# Altium PCB PCB6.PcbDoc
Units mil, origin at the board's own origin, x right, y up, seen from the top; angles counter-clockwise.
Board outline 4488.16 x 4488.19 mil, 2 copper layers (Top Layer, Bottom Layer); 61 components, 47 nets, 259 pads, 43 vias.
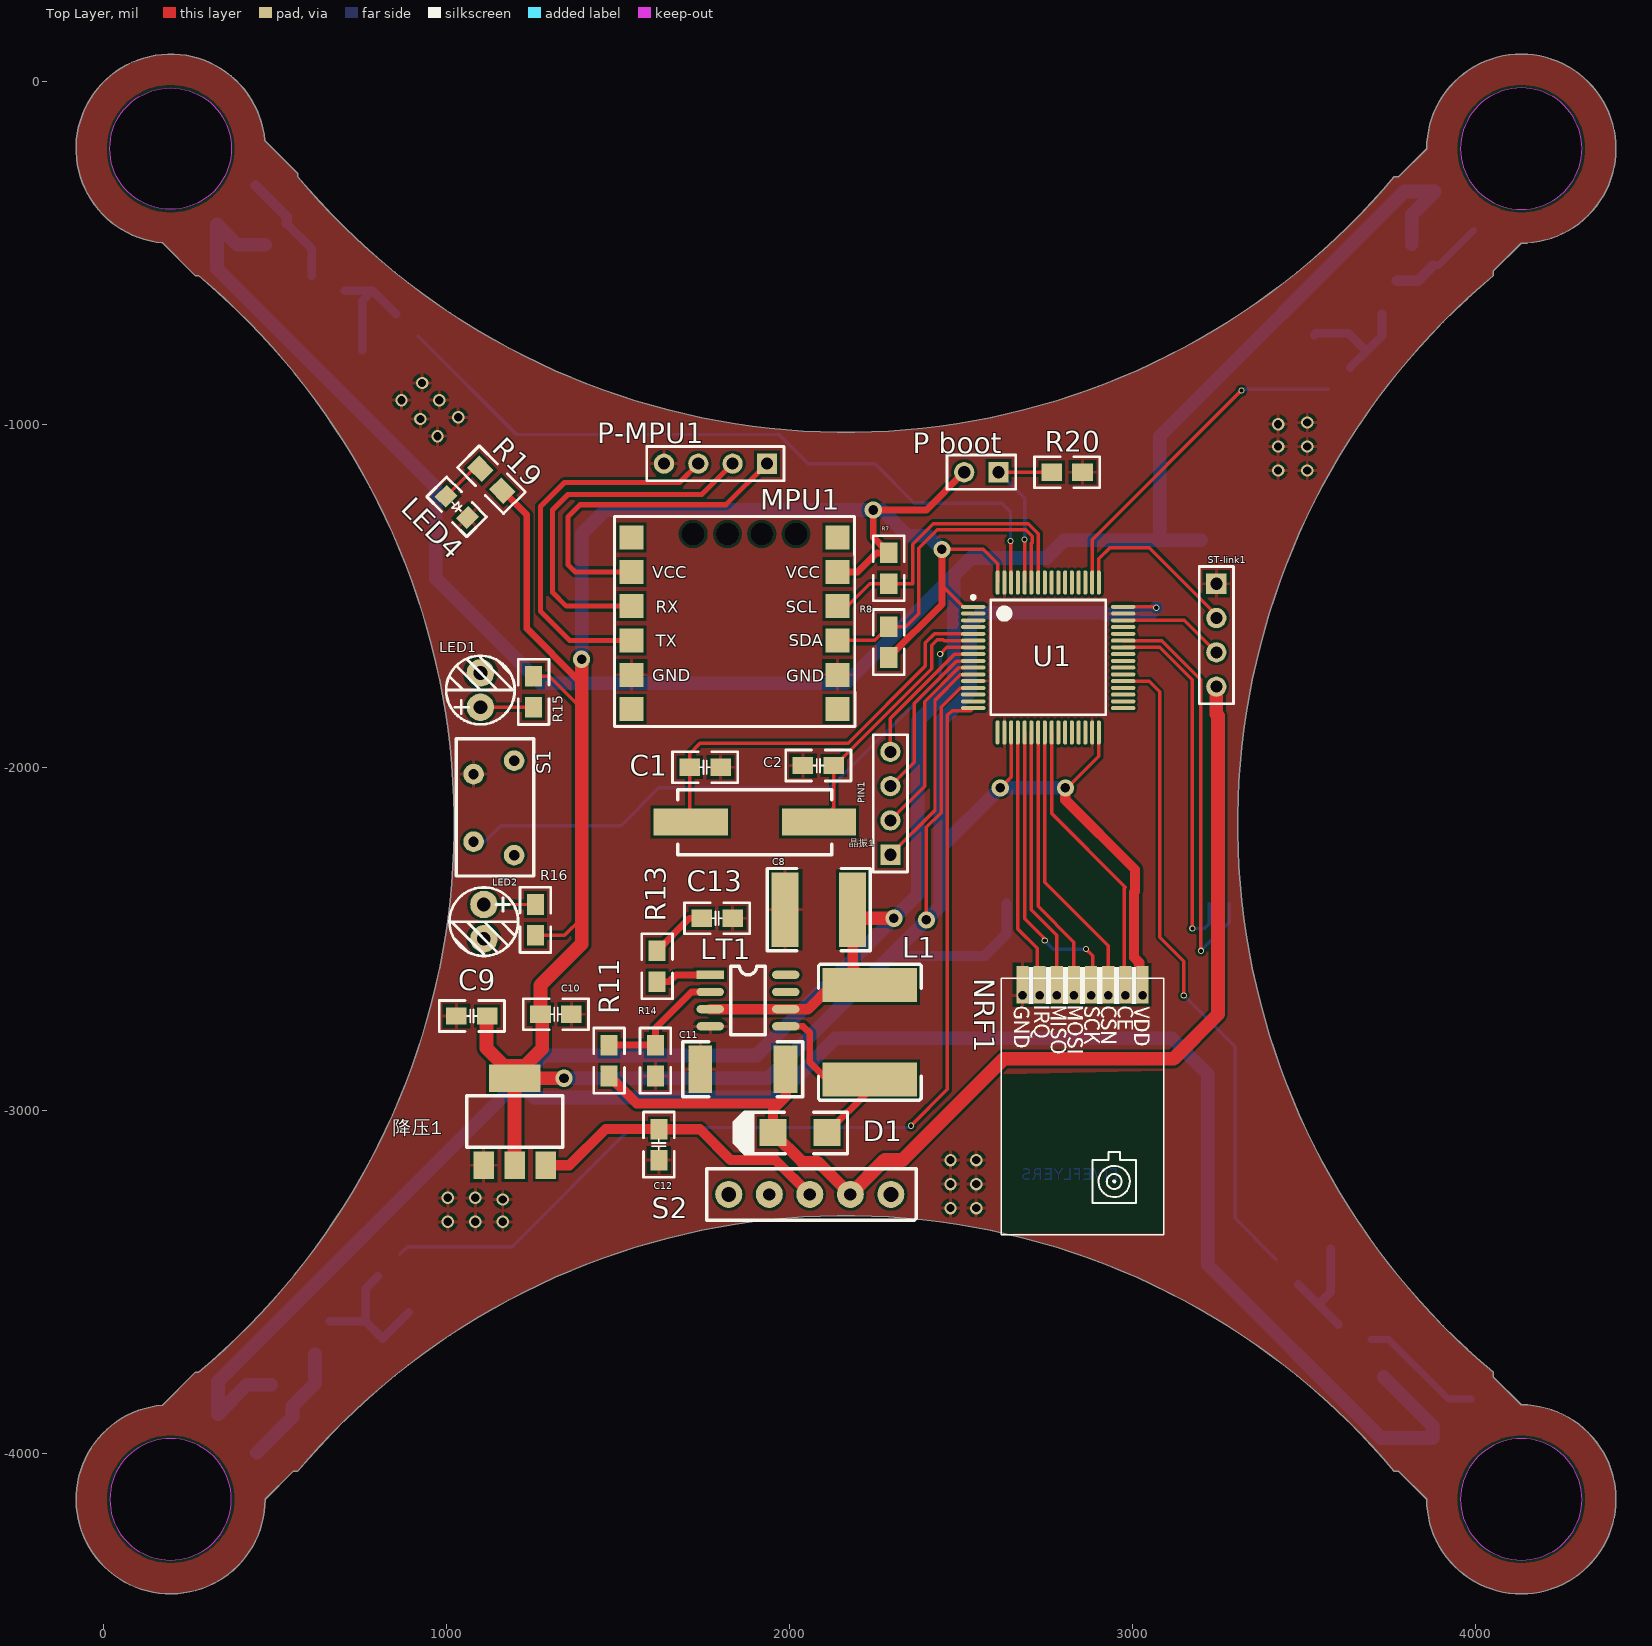
[diagram p0: Top Layer view]
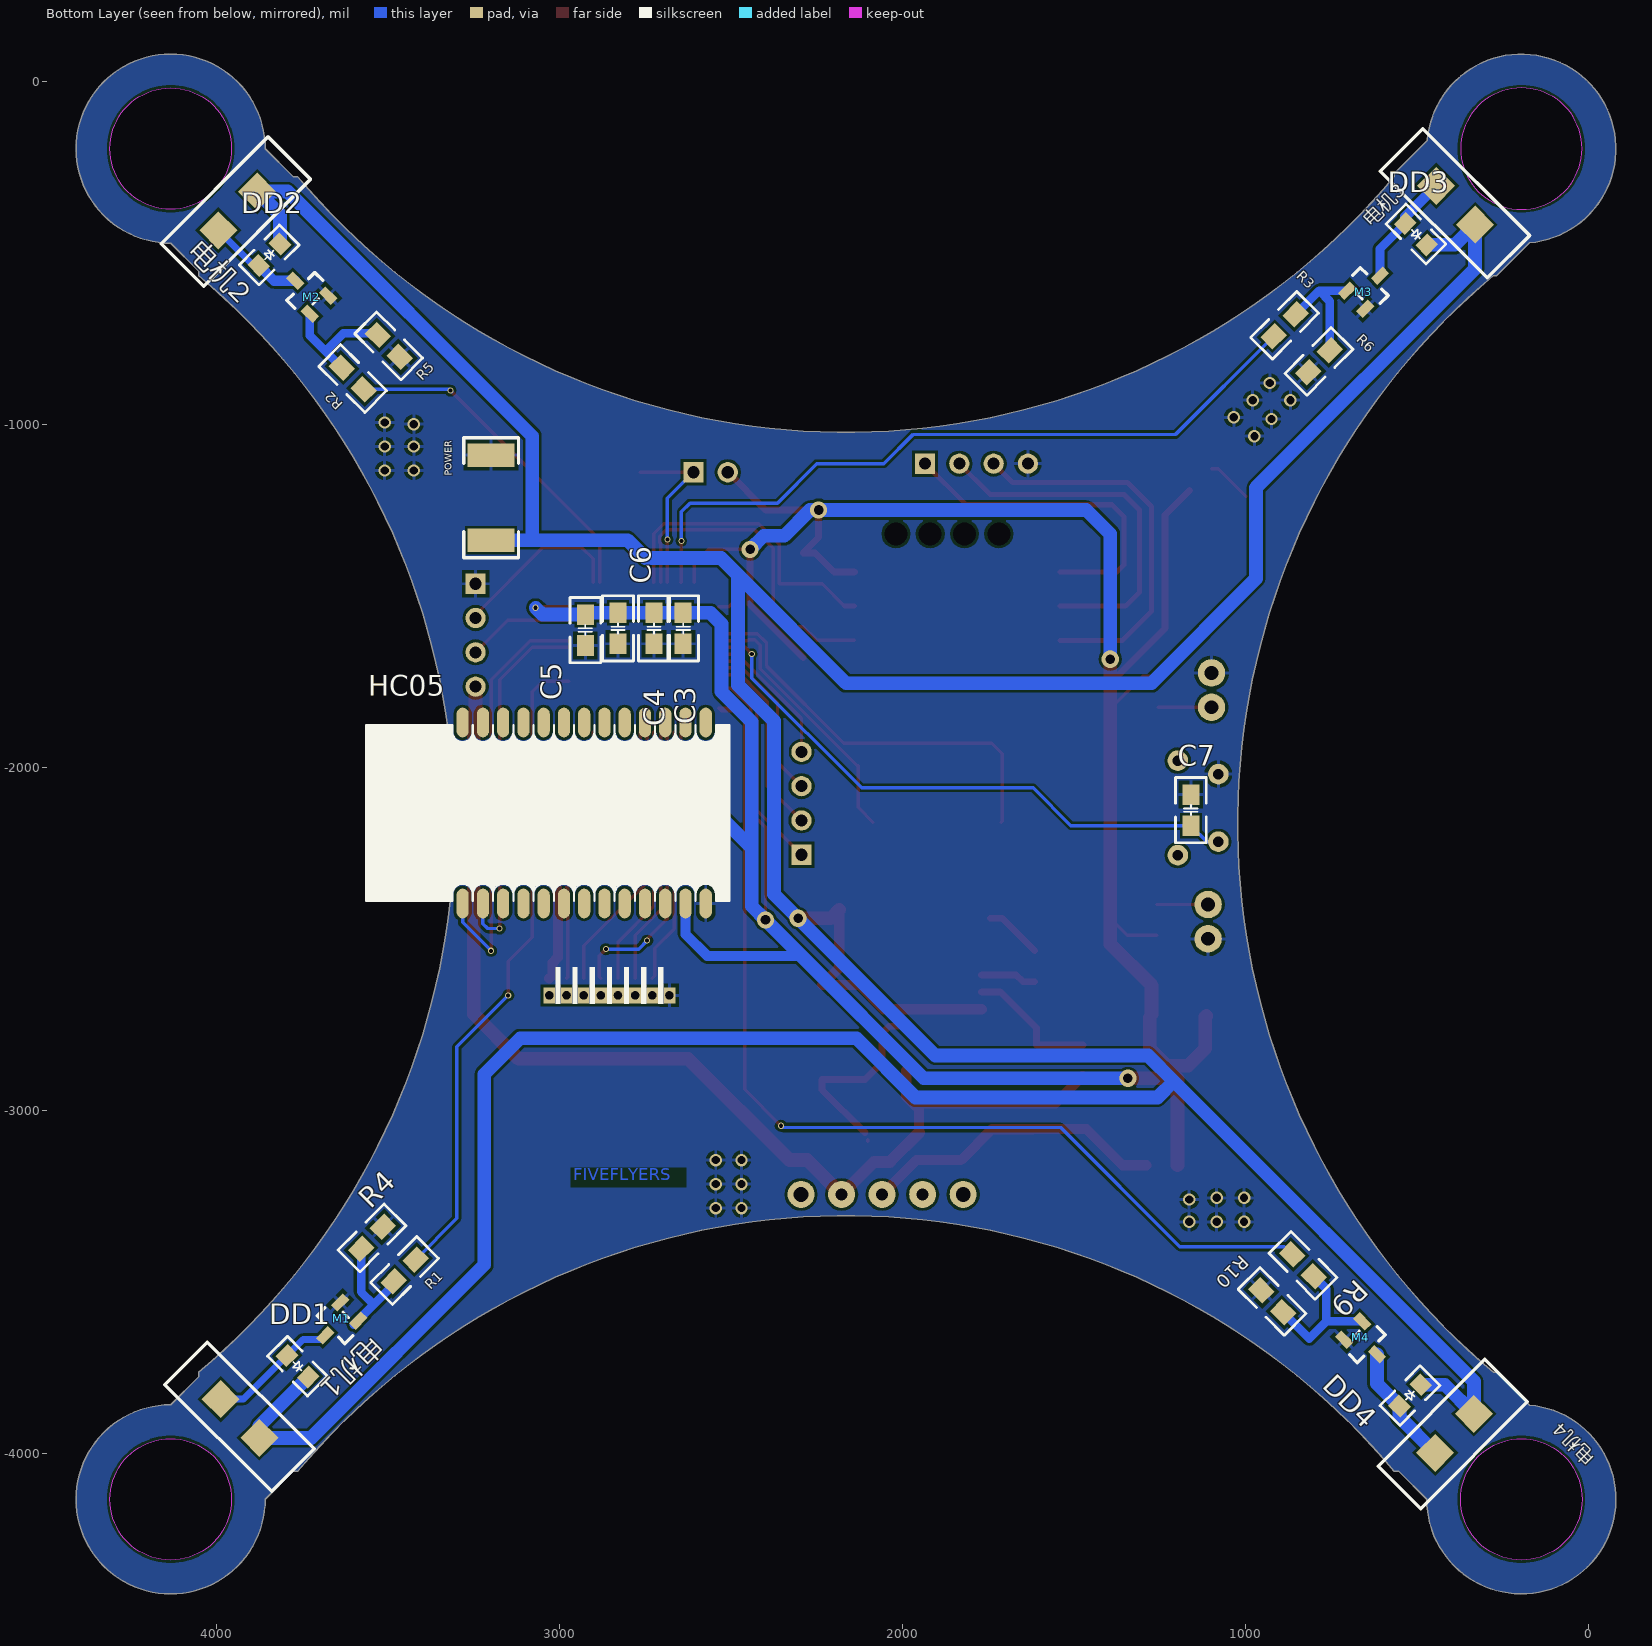
[diagram p1: Bottom Layer view, seen from below]

## Layer stack, top to bottom
Top Solder: solder mask 0.4, Solder Resist, Dk 3.5
Top Layer: signal copper 1.4
Dielectric 1: dielectric 12.6, FR-4, Dk 4.8
Bottom Layer: signal copper 1.4
Bottom Solder: solder mask 0.4, Solder Resist, Dk 3.5

## Board outline
172.83,-3859.32 ccw(c196.85,-4133.86) 472.44,-4133.86 553.85,-4052.45 566.92,-4052.45 cw(c2165.35,-5393.7) 3763.79,-4052.45 3776.86,-4052.45 3858.27,-4133.86 ccw(c4133.86,-4133.86) 4133.86,-3858.27 4052.45,-3776.86 4052.45,-3763.79 cw(c5393.7,-2165.35) 4052.45,-566.92 4052.45,-553.85 4133.86,-472.44 ccw(c4133.86,-196.85) 3858.27,-196.85 3776.86,-278.26 3763.79,-278.26 cw(c2165.35,1062.99) 566.92,-278.26 566.92,-268.35 471.39,-172.83 ccw(c196.85,-196.85) 172.83,-471.39 268.35,-566.92 278.26,-566.92 cw(c-1062.99,-2165.35) 278.26,-3763.79 268.35,-3763.79
cut-out: 196.85,-374.02 cw(c196.85,-196.85) 19.68,-196.85 cw(c196.85,-196.85) 196.85,-19.69 cw(c196.85,-196.85) 374.02,-196.85 cw(c196.85,-196.85)
cut-out: 3956.69,-196.85 ccw(c4133.86,-196.85) 4133.86,-374.02 ccw(c4133.86,-196.85) 4311.02,-196.85 ccw(c4133.86,-196.85) 4133.86,-19.69 ccw(c4133.86,-196.85)
cut-out: 19.68,-4133.86 ccw(c196.85,-4133.86) 196.85,-4311.02 ccw(c196.85,-4133.86) 374.02,-4133.86 ccw(c196.85,-4133.86) 196.85,-3956.69 ccw(c196.85,-4133.86)
cut-out: 3956.69,-4133.86 ccw(c4133.86,-4133.86) 4133.86,-4311.02 ccw(c4133.86,-4133.86) 4311.02,-4133.86 ccw(c4133.86,-4133.86) 4133.86,-3956.69 ccw(c4133.86,-4133.86)

## Design rules (kind name [scope] priority, off if disabled: settings)
Clearance [All] p1: gap=8
ComponentClearance [All] p1: gap=-999 collisioncheckmode=3 verticalgap=-999 showdistances=FALSE
PolygonConnect [All] p1: connectstyle=Relief reliefconductorwidth=10 reliefentries=4 polygonreliefangle="90 Angle" airgapwidth=10
RoutingVias [All] p1: holewidth=28 width=50 viastyle="Through Hole" minholewidth=12 minwidth=18 maxholewidth=28 maxwidth=50
SolderMaskExpansion [All] p1: expansion=4
Width [All] p1: maxlimit=999 minlimit=8 preferedwidth=10
29 further rules are at their usual default settings.

## Components (designator, comment, footprint, x,y, rotation, side; value= is the part's Value field where it differs from the comment)
C1 "22pF" 0805C 4310,-5475 r180 top
C2 "22PF" 0805C -470,1480 r0 top
C3 "100nF" 0805C 6115,-4150 r90 bottom
C4 "100nF" 0805C 6200,-4150 r90 bottom
C5 "100nF" 0805C 6400,-4155 r90 bottom
C6 "100nF" 0805C 6305,-4150 r90 bottom
C7 "100nF" 0805C -2315,430 r270 bottom
C8 "" 5*5.5 2086.57,-2415 r180 top
C9 "Cap" 0805C -1480,750 r0 top
C10 "Cap" 0805C 3875,-6195 r180 top
C11 "220uF" 6.3*7 1865,-2880 r180 top
C12 "10uF" 0805C 5095,-545 r270 top
C13 "100pF" 0805C 4345,-5915 r180 top
D1 "" SMA 2110,-3065 r180 top
DD1 "led" 0805d 4671.81,-18847.09 r225 bottom
DD2 "led" 0805d -11254.86,-1414.04 r135 bottom
DD3 "led" 0805d 1411.81,-15547.09 r225 bottom
DD4 "led" 0805d -14579.86,-4739.04 r135 bottom
HC05 "" HC05 2960,-2265 r0 bottom
L1 "" 7*7*4 2235,-2772.2 r270 top
LED1 "LED" RB.1/.2 1100,-1825 r270 top
LED2 "LED" RB.1/.2 1110,-2400 r90 top
LED4 "" 0805d 123.19,-16342.09 r315 top
LT1 "LT1308" SO-8 1770,-2605 r0 top
M1 "MOS" mos 2576.53,-629.99 r135 bottom
M2 "MOS" mos 744.99,-1688.47 r225 bottom
M3 "MOS" mos 1715.36,-3593.58 r315 bottom
M4 "MOS" mos 3643.58,-2604.64 r45 bottom
MPU1 "MPU" MPU 5720.67,-11168.11 r0 top
NRF1 "NRF" nrf 3448.58,-2569.57 r270 top
"P boot" "Header 2" HDR1X2 3130,-1600 r180 top
P-MPU1 "Header 4" HDR1X4#1 1935,-1115 r180 top
PIN1 "Header 4" HDR1X4#1 2295,-2255 r90 top
POWER "3.7V" 6.3*7 3200,-1214.02 r90 bottom
R1 "1k" 0805R -9237.21,8486.82 r315 bottom
R2 "1k" 0805R -8350.46,-13555.85 r45 bottom
R3 "1k" 0805R 13575.85,-12665.46 r135 bottom
R4 "10k" 0805R -9142.21,8581.82 r315 bottom
R5 "10k" 0805R -8455.46,-13460.85 r45 bottom
R6 "10k" 0805R 13475.85,-12770.46 r135 bottom
R7 "4.7k" 0805R 1770,-18845 r90 top
R8 "4.7k" 0805R 1770,-19060 r90 top
R9 "1k" 0805R 12786.82,9237.21 r225 bottom
R10 "10k" 0805R 12876.82,9132.21 r225 bottom
R11 "" 0805R 1995,14570 r270 top
R13 "" 0805R 2135,14845 r270 top
R14 "" 0805R 1090,-20280 r90 top
R15 "1K" 0805r 1775,15645 r270 top
R16 "1K" 0805R 740,-19870 r90 top
R19 "1K" 0805r 13085.46,-13850.85 r135 top
R20 "10k" 0805R 20235,-1660 r180 top
S1 "SW-PB" key 1075,-2576.85 r90 top
S2 "SW-PB" 总开关 -4190,-7915 r180 top
ST-link1 "Header 4" HDR1X4#2 3305,-1580 r270 top
U1 "STM32F101R8T6" LQFP64_N 2755,-1680 r0 top net-tie
晶振1 "晶振" LC-HC-49SMD 1900,-2160 r0 top
电机1 "MOTOR" "motor hanpan" 3860.86,-3841.86 r315 bottom
电机2 "MOTOR" "motor hanpan" 3995,-307.72 r225 bottom
电机3 "MOTOR" "motor hanpan" 317.72,-305 r315 bottom
电机4 "MOTOR" "motor hanpan" 448.14,-3870.86 r225 bottom
降压1 "LM1117-3.3V" SOT223 1109.45,-3160 r0 top

## Footprints (in the part's own frame and the unit in brackets; to place one, negate y for a bottom-side part, rotate by r counter-clockwise, add the part's x,y. Pads: shape width x height; smd on the part's side, far side on the other; paste and mask are expansions set on the pad)
5*5.5 [mm]
  rect 2x5.5 smd: 1(-2.5,0) 2(2.5,0)
  silkscreen extent -3.81,-3.05 3.81,3.05
6.3*7 [mm]
  rect 1.75x3.5 smd: 1(-3.15,0) 2(3.15,0)
  silkscreen extent -4.44,-2.03 4.44,2.03
7*7*4 [mm]
  rect 2.5x7 smd: 1(-3.5,0) 2(3.5,0)
  silkscreen extent -5.03,-3.8 5.03,3.8
0805C [mil]
  rect 60x50 smd: 1(2510,-3475) 2(2600,-3475)
  silkscreen extent 2460,-3520 2650,-3430
0805d [mil]
  rect 45x50 smd: 1(-10080,11320) 2(-9992,11320)
  silkscreen extent -10119,11279 -9954,11361
0805R [mil]
  rect 60x50 smd: 1(17380,-520) 2(17470,-520)
  silkscreen extent 17330,-565 17520,-475
0805r [mil]
  rect 60x50 smd: 1(17380,-520) 2(17470,-520)
  silkscreen extent 17330,-565 17520,-475
HC05 [mm]
  oval 0.9x2.2 smd: 1(8.199,3.353) 2(6.699,3.353) 3(5.199,3.353) 4(3.699,3.353) 5(2.199,3.353) 6(0.699,3.353) 7(-0.801,3.353) 8(-2.301,3.353) 9(-3.801,3.353) 10(-5.301,3.353) 11(-6.801,3.353) 12(-8.301,3.353) 13(-9.801,3.353) 22(-9.801,-10.047) 23(-8.301,-10.047) 24(-6.801,-10.047) 25(-5.301,-10.047) 26(-3.801,-10.047) 27(-2.301,-10.047) 28(-0.801,-10.047) 29(0.699,-10.047) 30(2.199,-10.047) 31(3.699,-10.047) 32(5.199,-10.047) 33(6.699,-10.047) 34(8.199,-10.047)
  silkscreen extent -11.55,-9.85 15.35,3.15
HDR1X2 [mm]
  rect 1.5x1.5 hole 0.9: 1(13.208,-11.684)
  round 1.5 hole 0.9: 2(15.748,-11.684)
  silkscreen extent 11.94,-12.95 17.02,-10.41
HDR1X4#1 [mm] "Connector; Header; 4 Position"
  rect 1.5x1.5 hole 0.9: 1(0,0)
  round 1.5 hole 0.9: 2(2.54,0) 3(5.08,0) 4(7.62,0)
  silkscreen extent -1.27,-1.27 8.89,1.27
HDR1X4#2 [mm]
  rect 1.5x1.5 hole 0.9: 1(-2.921,-1.524)
  round 1.5 hole 0.9: 2(-0.381,-1.524) 3(2.159,-1.524) 4(4.699,-1.524)
  silkscreen extent -4.19,-2.79 5.97,-0.25
key [mil]
  round 60 hole 30: 1(360,-5) 2(556.85,-5) 3(320.63,-123.11) 4(596.22,-123.11)
  silkscreen extent 260,-180 660,45
LC-HC-49SMD [mm]
  rect 5.5x2 smd: 1(-4.75,0) 2(4.75,0)
  silkscreen extent -5.7,-2.4 5.7,2.4, body extent -6.7,-2.46 6.7,2.44, height 4
LQFP64_N [mm] "Thin QFP, 64-Leads, Body 10x10mm, Pitch 0.5mm, IPC Medium Density"
  oval 1.8x0.3 smd: 1(-5.55,3.75) 2(-5.55,3.25) 3(-5.55,2.75) 4(-5.55,2.25) 5(-5.55,1.75) 6(-5.55,1.25) 7(-5.55,0.75) 8(-5.55,0.25) 9(-5.55,-0.25) 10(-5.55,-0.75) 11(-5.55,-1.25) 12(-5.55,-1.75) 13(-5.55,-2.25) 14(-5.55,-2.75) 15(-5.55,-3.25) 16(-5.55,-3.75) 33(5.55,-3.75) 34(5.55,-3.25) 35(5.55,-2.75) 36(5.55,-2.25) 37(5.55,-1.75) 38(5.55,-1.25) 39(5.55,-0.75) 40(5.55,-0.25) 41(5.55,0.25) 42(5.55,0.75) 43(5.55,1.25) 44(5.55,1.75) 45(5.55,2.25) 46(5.55,2.75) 47(5.55,3.25) 48(5.55,3.75)
  oval 0.3x1.8 smd: 17(-3.75,-5.55) 18(-3.25,-5.55) 19(-2.75,-5.55) 20(-2.25,-5.55) 21(-1.75,-5.55) 22(-1.25,-5.55) 23(-0.75,-5.55) 24(-0.25,-5.55) 25(0.25,-5.55) 26(0.75,-5.55) 27(1.25,-5.55) 28(1.75,-5.55) 29(2.25,-5.55) 30(2.75,-5.55) 31(3.25,-5.55) 32(3.75,-5.55) 49(3.75,5.55) 50(3.25,5.55) 51(2.75,5.55) 52(2.25,5.55) 53(1.75,5.55) 54(1.25,5.55) 55(0.75,5.55) 56(0.25,5.55) 57(-0.25,5.55) 58(-0.75,5.55) 59(-1.25,5.55) 60(-1.75,5.55) 61(-2.25,5.55) 62(-2.75,5.55) 63(-3.25,5.55) 64(-3.75,5.55)
  silkscreen extent -5.67,-4.25 4.25,4.57, body extent -5,-5 5,5, height 1.6
mos [mm]
  rect 1.25x0.7 smd: 1(-71.725,-35.424) 2(-71.725,-33.524) 3(-74.225,-34.474)
  silkscreen extent -73.63,-35.93 -72.07,-33.01, body extent -74.47,-35.97 -71.47,-32.97, height 1.3
"motor hanpan" [mil]
  rect 78.74x78.74 smd: 1(90,70) 2(90,-90)
  silkscreen extent 0,-235 175,205
MPU [mil]
  oval 39.37x47.24 hole 66.93: 0(-4000.67,9848.11) 0(-3900.67,9848.11) 0(-3800.67,9848.11)
  rect 39.37x47.24 hole 66.93: 0(-3700.67,9848.11)
  rect 70x70 smd: 1(-4180.04,9837.74) 2(-4180.04,9737.74) 3(-4180.04,9637.74) 4(-4180.04,9537.74) 5(-4180.04,9437.74) 6(-4180.04,9337.74) 7(-3580.04,9337.74) 8(-3580.04,9437.74) 9(-3580.04,9537.74) 10(-3580.04,9637.74) 11(-3580.04,9737.74) 12(-3580.04,9837.74)
  silkscreen extent -4230,9287 -3529,9899
nrf [mil]
  rect 70.87x35.43 smd: 1(45.44,-418.58) 2(45.44,-468.58) 3(45.44,-518.58) 4(45.44,-568.58) 5(45.44,-618.58) 6(45.44,-668.58) 7(45.44,-718.58) 8(45.44,-768.58)
  rect 47.24x35.43 hole 23.62 slot 23.82 at 0 deg: 1(95.44,-418.58) 2(95.44,-468.58) 3(95.44,-518.58) 4(95.44,-568.58) 5(95.44,-618.58) 6(95.44,-668.58) 7(95.44,-718.58) 8(95.44,-768.58)
  silkscreen extent 14,-830 793,-358
RB.1/.2 [mil]
  round 80 hole 40: 1(0,0) 2(-100,0)
  silkscreen extent -150,-100 50,100
SMA [mm]
  rect 2x2 smd: A(0,0) K(4,0)
  silkscreen extent -1.52,-1.52 6.86,1.55
SO-8 [mil]
  rect 80x24 smd: 1(0,0)
  oval 80x24 smd: 2(0,-50) 3(0,-100) 4(0,-150) 5(220,-150) 6(220,-100) 7(220,-50) 8(220,0)
  silkscreen extent 60,-175 160,25
SOT223 [mil]
  rect 59x79 smd: 1(0,0) 2(90.55,0) 3(181.1,0)
  rect 150x79 smd: 4(89.88,253.54)
  silkscreen extent -49,52 231,202
总开关 [mm]
  round 2 hole 0.9: 1(-161.75,-118.618) 2(-158.75,-118.618) 3(-155.75,-118.618)
  round 2 hole 1.1: 4(-152.75,-118.618) 5(-164.75,-118.618)
  silkscreen extent -166.62,-120.52 -151.13,-116.71

## Part data
C1 C2 C3 C4 C5 C6 C7 C13: library part 陶瓷电容
C8 C11 POWER: library part CAP-T, "钽电容"
C9 C10: "Capacitor"
C12: library part C_0.1uF, "SMD-CAP"
D1: library part "Diode 11DQ03", "Schottky Rectifier"
HC05: library part HC05
L1: library part Inductor, "Inductor"
LED1 LED2: "LED发光管"
LED4 R1 R2 R3 R4 R5 R6 R7 R8 R9 R10 R15 R16 R19: library part R, "电阻"
MPU1: library part mpu9250
NRF1: library part Component_2.nrf, "nrf"
"P boot": "Header, 2-Pin"
P-MPU1 PIN1 ST-link1: "Header, 4-Pin"
R11 R13 R14: library part Res3, "Resistor"
R20: library part R
S1 S2: "Switch"
U1: "STM32 ARM-based 32-bit MCU with 64 Kbytes Flash, 64-pin LQFP, Industrial Temperature"
降压1: library part Component_1

## Via types
v1: diameter 36, hole 24, Top Layer to Bottom Layer, 24 vias
v2: diameter 18, hole 12, Top Layer to Bottom Layer, 11 vias
v3: diameter 50, hole 28, Top Layer to Bottom Layer, 8 vias

## Nets (pads, with @x,y where several pads share a name; then routed paths per layer and width w, separated by ;. In a path a pad name is that pad's centre, name@x,y a point inside that pad or via, vN(x,y) a via of type N, cw(c..) or ccw(c..) an arc to the next point about the centre after c; other vN are vias at no path point)
BOOT: "P boot.1" R20.2 U1.60 | length 508
  Top Layer w10: 2610,-1140 R20.2 ; U1.60 v2(2686.1,-1336.1)
  Bottom Layer w10: 2610,-1140 2686.1,-1216.1 v2(2686.1,-1336.1)
CE: NRF1.2 U1.25 | length 808.1
  Top Layer w10: U1.25 2764.84,-2134.84 2980,-2350 2977,-2353 2977,-2612 NRF1.2@2980,-2615
CSN: NRF1.3 U1.24 | length 793.1
  Top Layer w10: U1.24 2745.16,-2335.16 2930,-2520 NRF1.3@2930,-2615
GND: C1.1 C2.1 C3.1 C4.1 C5.1 C6.1 C7.1 C8.2 C9.1 C10.1 C11.2 C12.2 C13.1 HC05.13 LED1.2 LED2.2 LED4.2 LT1.4 M1.2 M2.2 M3.2 M4.2 MPU1.5 MPU1.8 NRF1.8 P-MPU1.4 POWER.2 R4.1 R5.1 R6.1 R10.1 R14.1 R20.1 S1.2 ST-link1.1 U1.12 U1.18 U1.31 U1.47 U1.63 降压1.1
  other v1: 1005,-3325 1085,-3325 1165,-3325 2470,-3285 2545,-3285 1165,-3260 1005,-3255 1085,-3255 2470,-3215 2545,-3215 2470,-3145 2545,-3145 3425,-1135 3510,-1135 3425,-1065 3510,-1065 975,-1035 3425,-1000 3510,-995 925,-985 1035,-980 870,-930 980,-930 930,-880
IRQ: NRF1.7 U1.20 | length 742.8
  Top Layer w10: U1.20 2666.42,-2471.42 2723,-2528 2723,-2608 NRF1.7@2730,-2615
MISO: NRF1.6 U1.22 | length 747.2
  Top Layer w10: U1.22 2705.79,-2415.79 2780,-2490 NRF1.6@2780,-2615
MOSI: NRF1.5 U1.23 | length 759.8
  Top Layer w10: U1.23 2725.47,-2405.47 2830,-2510 NRF1.5@2830,-2615
NetC1_2: C1.2 U1.5 晶振1.1 | length 1212.6
  Top Layer w10: 晶振1.1 1710,-2157.01 C1.2 1710,-1960 1740,-1930 2171.85,-1930 2397,-1704.85 2397,-1636.9 2423.43,-1610.47 2460.47,-1610.47 2461.1,-1611.1 U1.5
NetC2_2: C2.2 U1.6 晶振1.2 | length 781.9
  Top Layer w10: 晶振1.2 2130,-2117.01 C2.2 2132.31,-1995 2415,-1712.31 2415,-1644.36 2430.89,-1628.47 2449.11,-1628.47 2451.43,-1630.79 U1.6
NetC7_2: C7.2 S1.1 U1.7 | length 1732.1
  Top Layer w10: v2(2440,-1670) 2459.53,-1650.47 U1.7
  Bottom Layer w10: S1.1 1113.15,-2216.85 C7.2 1510,-2170 1620,-2060 2120,-2060 2440,-1740 v2(2440,-1670)
NetC12_1: C12.1 S2.2 降压1.3 | length 892.1
  Top Layer w10: C12.1@1619.45,-3054.45 C12.1
  Top Layer w30: 降压1.3 1359.45,-3160 1465,-3054.45 C12.1@1619.45,-3054.45 ; C12.1 1740,-3055 1830,-3145 1960,-3145 S2.2
NetC13_2: C13.2 R13.1 | length 169.4
  Top Layer w20: R13.1 1710,-2440 C13.2
NetD1_A: D1.A L1.2 LT1.5 | length 570.5
  Top Layer w10: D1.A@2102.48,-3090 D1.A@2102.48,-3085.32
  Top Layer w20: LT1.5 2040,-2755 2060,-2775 2060,-2860 2110,-2910 L1.2 2235,-2940 D1.A
NetDD1_1: DD1.1 M1.3 电机1.2 | length 364.1
  Bottom Layer w20: M1.3@3696.26,-3667.48 3747.48,-3667.48 3921.86,-3841.86 电机1.2
NetDD2_1: DD2.1 M2.3 电机2.2 | length 284.8
  Bottom Layer w10: DD2.1 DD2.1@3892.77,-537.23
  Bottom Layer w20: DD2.1@3892.77,-537.23 电机2.2
  Bottom Layer w30: M2.3 3832.6,-581.85 DD2.1
NetDD3_1: DD3.1 M3.3 电机3.2 | length 330.3
  Bottom Layer w25: DD3.1 608.74,-488.74 M3.3
  Bottom Layer w30: 电机3.2 535,-395 DD3.1
NetDD4_1: DD4.1 M4.3 电机4.2 | length 357
  Bottom Layer w40: 电机4.2 552.23,-3894.05 DD4.1 617.52,-3796.93 M4.3
NetLED1_1: LED1.1 R15.2 | length 155
  Top Layer w10: LED1.1 R15.2
NetLED2_1: LED2.1 R16.2 | length 150
  Top Layer w10: LED2.1 R16.2
NetLED4_1: LED4.1 R19.2 | length 133.1
  Top Layer w10: LED4.1 1080,-1130 R19.2
NetLT1_1: LT1.1 R13.2 | length 163.3
  Top Layer w20: R13.2 1650,-2625 1670,-2605 LT1.1
NetLT1_2: LT1.2 R11.1 R14.2 | length 388.5
  Top Layer w20: R11.1 R14.2 1610,-2760 1715,-2655 LT1.2
NetM1_1: M1.1 R1.2 R4.2 | length 351.6
  Bottom Layer w10: R1.2@3483.64,-3507.75 R1.2
  Bottom Layer w25: R1.2@3483.64,-3507.75 3541.93,-3566.04 ; R4.2 3578.64,-3529.33 3541.93,-3566.04 ; M1.1@3600.22,-3624.33 3541.93,-3566.04
NetM2_1: M2.1 R2.2 R5.2 | length 374.8
  Bottom Layer w25: R5.2 3535,-735 3630,-735 3677.5,-782.5 3687.5,-782.5 ; R2.2 3687.5,-782.5 ; M2.1 3727.89,-742.11 3687.5,-782.5
NetM3_1: M3.1 R3.2 R6.2 | length 366
  Bottom Layer w25: M3.1 785.67,-610.67 ; R6.2 755,-641.35 785.67,-610.67 ; R3.2 785.67,-610.67
NetM4_1: M4.1 R9.2 R10.2 | length 429.5
  Bottom Layer w25: M4.1 765.22,-3615.22 ; R9.2 765.22,-3519.78 765.22,-3615.22 ; R10.2 815,-3665 765.22,-3615.22
PC0: PIN1.4 U1.8 | length 416.4
  Top Layer w10: PIN1.4 2295,-1857.76 2481.83,-1670.94 2535.72,-1670.94 U1.8
PC1: PIN1.3 U1.9 | length 487
  Top Layer w10: PIN1.3 2365,-1985 2365,-1813.22 2487.6,-1690.62 2529.38,-1690.62 U1.9@2530.16,-1689.84
PC2: PIN1.2 U1.10 | length 569.1
  Top Layer w10: PIN1.2 2395,-2055 2395,-1808.67 2493.37,-1710.31 2533.44,-1710.31 U1.10@2535,-1708.75
PC3: PIN1.1 U1.11 | length 644.5
  Top Layer w10: PIN1.1 2425,-2125 2425,-1804.13 2499.14,-1729.99 2531.88,-1729.99 U1.11@2533.44,-1728.43
PWMA: R1.1 U1.37 | length 1915.2
  Top Layer w10: U1.37 3048.9,-1748.9 3080,-1780 3080,-2495 3150,-2565 v2(3150,-2665)
  Bottom Layer w10: v2(3150,-2665) 3300,-2815 3300,-3315 R1.1
PWMB: R2.1 U1.50 | length 998.9
  Top Layer w10: U1.50 2882.95,-1337.05 v2(3318.18,-901.82)
  Bottom Layer w10: v2@3315,-905 v2(3318.18,-901.82) 3321.36,-898.64 R2.1
PWMC: R3.1 U1.62 | length 2145.4
  Top Layer w10: v2(2645,-1340) 2645.95,-1340.95 2645.95,-1460.72 U1.62
  Bottom Layer w10: R3.1 1205,-1030 1970,-1030 2055,-1115 2250,-1115 2365,-1230 2620,-1230 2645,-1255 v2(2645,-1340)
PWMD: R9.1 U1.16 | length 2998.7
  Top Layer w10: v2(2355,-3045) 2461,-2939 2461,-1849 2475,-1835 2529.13,-1835 U1.16 U1.16@2507.36,-1827.64
  Bottom Layer w10: R9.1 887.5,-3397.5 1192.5,-3397.5 1540,-3050 2350,-3050 v2(2355,-3045)
RX: MPU1.3 P-MPU1.2 | length 1068.3
  Top Layer w15: MPU1.3 1350.37,-1530.37 1310,-1490 1310,-1250 1355,-1205 1745,-1205 P-MPU1.2
RX_MCU: HC05.1 U1.43 | length 1236.4
  Top Layer w10: U1.43 3086.24,-1630.79 3200,-1744.54 v2(3200,-2535)
  Bottom Layer w10: v2(3200,-2535) 3282.8,-2452.2 HC05.1
SCK: NRF1.4 U1.21 | length 856.6
  Top Layer w10: U1.21 2686.1,-2441.1 2745,-2500 v2(2745,-2505) ; v2(2865,-2530) 2885,-2550 2885,-2610 NRF1.4@2880,-2615
  Bottom Layer w10: v2(2745,-2505) 2770,-2530 v2(2865,-2530)
SCL: MPU1.10 R7.1 U1.58 | length 906.9
  Top Layer w10: MPU1.10@2169.63,-1530.37 2235,-1465 R7.1 2360,-1465 2360,-1350 2420,-1290 2696.57,-1290 2726.1,-1319.53 2726.1,-1460.87 U1.58
  Top Layer w15: MPU1.10 MPU1.10@2169.63,-1530.37
SDA: MPU1.9 R8.2 U1.59 | length 955.6
  Top Layer w10: MPU1.9 2249.63,-1630.37 R8.2 2340,-1590 2378,-1552 2378,-1362 2432,-1308 2689.11,-1308 2708.1,-1326.99 2708.1,-1345.22 2705.79,-1347.53 U1.59
SWCLK: ST-link1.2 U1.49 | length 515.7
  Top Layer w10: U1.49 2902.64,-1392.36 2935,-1360 3050,-1360 3245,-1555 ST-link1.2
SWDIO: ST-link1.3 U1.46 | length 310.1
  Top Layer w10: U1.46 3151.73,-1571.73 ST-link1.3
TX: MPU1.4 P-MPU1.3 | length 1117.8
  Top Layer w15: MPU1.4 1360.37,-1630.37 1275,-1545 1275,-1240 1345,-1170 1680,-1170 P-MPU1.3
TX_MCU: HC05.2 U1.42 | length 1079.3
  Top Layer w10: U1.42 3080.47,-1650.47 3175,-1745 v2(3175,-2470)
  Bottom Layer w10: v2(3175,-2470) 3210,-2470 3223.74,-2456.26 HC05.2
VCC3.3V: "P boot.2" C3.2 C4.2 C5.2 C6.2 C9.2 C10.2 HC05.12 MPU1.11 NRF1.1 R7.2 R8.1 R15.1 R16.1 R19.1 U1.1 U1.13 U1.19 U1.32 U1.48 U1.64 降压1.2 降压1.4 | length 11219.4
  Top Layer w10: R15.1 1300,-1735 1395,-1830 ; R16.1 1345,-2490 1395,-2440 ; v3(2400,-2445) 2400,-2175.46 2443,-2132.46 2443,-1825.5 2499.14,-1769.36 2535.72,-1769.36 U1.13 ; 2445,-1470 2507.36,-1532.36 U1.1 ; v3(2445,-1365) 2565,-1365 2607.36,-1407.36 U1.64 ; v3@2615,-2052.69 v3(2615,-2060) 2646.73,-2028.27 U1.19 ; v3(2805,-2060) 2810.28,-2060 2902.64,-1967.64 U1.32 ; U1.48 3067.36,-1532.36 v2(3070,-1535)
  Top Layer w15: 降压1.2@1199.33,-3159.33 降压1.2
  Top Layer w20: R19.1 1235,-1265 1235,-1595 1385,-1745 1395,-1745 ; MPU1.11 2199.63,-1430.37 2255,-1375 R7.2 2245,-1330 v3(2245,-1250) 2400,-1250 2510,-1140 ; R8.1 2445,-1525 2445,-1470 v3(2445,-1365)
  Top Layer w30: v3(2805,-2060) 2805,-2095 3008,-2298 3008,-2361.6 3005,-2364.6 3005,-2554.32 3020.72,-2570.04 3020.72,-2605.72 NRF1.1@3030,-2615
  Top Layer w40: C9.2@1115,-2725 1117.88,-2727.88 1117.88,-2819.21 1168.66,-2870 1230,-2870 1280,-2820 C10.2@1280,-2730 ; 降压1.2@1199.33,-3159.33 降压1.4 v3(1343.54,-2906.46) ; C10.2 1275,-2635 1395,-2515 1395,-2440 1395,-1830 1395,-1745 v3(1395,-1685)
  Bottom Layer w30: 2295,-2550 2570,-2550 2633.19,-2486.81 HC05.12
  Bottom Layer w40: v3(1343.54,-2906.46) 1938.54,-2906.46 2295,-2550 v3(2400,-2445) 2440,-2405 2440,-2235 ; v3(1395,-1685) 1395,-1320 1465,-1250 v3(2245,-1250) 2270,-1250 2345,-1325 2405,-1325 v3(2445,-1365) ; v3(2805,-2060) v3(2615,-2060) 2440,-2235 ; v2(3070,-1535) 3050,-1555 C5.2 2920,-1550 C6.2 C4.2 C3.2 2560,-1550 2528,-1582 2528,-1779.88 2440,-1867.88 2440,-2235
VCC3.3VMPU: MPU1.2 P-MPU1.1 | length 978.3
  Top Layer w15: MPU1.2 1375.37,-1430.37 1355,-1410 1355,-1270 1390,-1235 1815,-1235 P-MPU1.1
VCC3.7V: C8.1 DD1.2 DD2.2 DD3.2 DD4.2 L1.1 LT1.3 LT1.6 POWER.1 电机1.1 电机2.1 电机3.1 电机4.1 | length 14127.2
  Top Layer w30: LT1.3 LT1.6 2055,-2705 2125.59,-2634.41 L1.1 2185,-2584.41 C8.1
  Top Layer w40: C8.1 2210,-2440 v3(2305,-2440)
  Bottom Layer w40: DD3.2 390.95,-477.23 电机3.1 331.86,-546.86 970,-1185 970,-1450 1275,-1755 2165,-1755 2480,-1440 ; DD4.2 420,-3800 电机4.1 335,-3790 1210,-2915 ; POWER.1 3088.03,-1338.03 ; DD1.2 3875,-3919.45 电机1.1 3725,-3955 3220,-3450 3220,-2895 3115,-2790 2135,-2790 1962.5,-2962.5 1257.5,-2962.5 1210,-2915 ; DD2.2 3815,-388.73 电机2.1 3793.14,-321.86 3080,-1035 3080,-1330 3088.03,-1338.03 ; 1210,-2915 1285,-2840 1905,-2840 v3(2305,-2440) 2375,-2370 2375,-1865 2480,-1760 2480,-1440 ; 2480,-1440 2530,-1390 2750,-1390 2801.97,-1338.03 3088.03,-1338.03
VCC5.0V: C11.1 D1.K R11.2 S2.1 ST-link1.4 | length 3268.8
  Top Layer w30: R11.2 1555,-2980 1965,-2980 1967.5,-2982.5 ; D1.K 1952.52,-2997.48 1967.5,-2982.5 ; C11.1@1990,-2885 1990,-2960 1967.5,-2982.5
  Top Layer w35: D1.K 2037.52,-3150 2083.11,-3150 S2.1
  Top Layer w40: S2.1 2278.11,-3145 2330,-3145 2625,-2850 3120,-2850 3250,-2720 3250,-1850 3245,-1845 ST-link1.4
pads on no net: HC05.3 HC05.4 HC05.5 HC05.6 HC05.7 HC05.8 HC05.9 HC05.10 HC05.11 HC05.22 HC05.23 HC05.24 HC05.25 HC05.26 HC05.27 HC05.28 HC05.29 HC05.30 HC05.31 HC05.32 HC05.33 HC05.34 LT1.7 LT1.8 MPU1.0 MPU1.1 MPU1.6 MPU1.7 MPU1.12 S1.3 S1.4 S2.3 S2.4 S2.5 U1.2 U1.3 U1.4 U1.14 U1.15 U1.17 U1.26 U1.27 U1.28 U1.29 U1.30 U1.33 U1.34 U1.35 U1.36 U1.38 U1.39 U1.40 U1.41 U1.44 U1.45 U1.51 U1.52 U1.53 U1.54 U1.55 U1.56 U1.57 U1.61

## Polygon pours and split planes (outlines as drawn)
GND on Top Layer "Top Layer-No Net" (solid, remove dead copper, pour order 4): 172.83,-3859.32 ccw(c196.85,-4133.86) 472.44,-4133.86 553.85,-4052.45 566.92,-4052.45 cw(c2165.35,-5393.7) 3763.79,-4052.45 3776.86,-4052.45 3858.27,-4133.86 ccw(c4133.86,-4133.86) 4133.86,-3858.27 4052.45,-3776.86 4052.45,-3763.79 cw(c5393.7,-2165.35) 4052.45,-566.92 4052.45,-553.85 4133.86,-472.44 ccw(c4133.86,-196.85) 3858.27,-196.85 3776.86,-278.26 3763.79,-278.26 cw(c2165.35,1062.99) 566.92,-278.26 566.92,-268.35 471.39,-172.83 ccw(c196.85,-196.85) 172.83,-471.39 268.35,-566.92 278.26,-566.92 cw(c-1062.99,-2165.35) 278.26,-3763.79 268.35,-3763.79
GND on Bottom Layer "GND_L02_P005" (solid, pour order 5): 172.83,-3859.32 ccw(c196.85,-4133.86) 472.44,-4133.86 553.85,-4052.45 566.92,-4052.45 cw(c2165.35,-5393.7) 3763.79,-4052.45 3776.86,-4052.45 3858.27,-4133.86 ccw(c4133.86,-4133.86) 4133.86,-3858.27 4052.45,-3776.86 4052.45,-3763.79 cw(c5393.7,-2165.35) 4052.45,-566.92 4052.45,-553.85 4133.86,-472.44 ccw(c4133.86,-196.85) 3858.27,-196.85 3776.86,-278.26 3763.79,-278.26 cw(c2165.35,1062.99) 566.92,-278.26 566.92,-268.35 471.39,-172.83 ccw(c196.85,-196.85) 172.83,-471.39 268.35,-566.92 278.26,-566.92 cw(c-1062.99,-2165.35) 278.26,-3763.79 268.35,-3763.79

## Other copper
Top Layer:
  pour cut-out: 3090,-2885 3090,-3360 2625,-3360 2620,-3365 2620,-2895
Bottom Layer:
  text "FIVEFLYERS" at 2960,-3215 h60

## Text inside footprints (layer, text, board x,y; h text height)
MPU1: Top Overlay "VCC" at 1600.63,-1449.37 h35; Top Overlay "VCC" at 1990.63,-1449.37 h35; Top Overlay "GND" at 1600.63,-1749.37 h35; Top Overlay "GND" at 1990.84,-1750.21 h35; Top Overlay "RX" at 1610.63,-1549.37 h35; Top Overlay "TX" at 1610.63,-1649.37 h35; Top Overlay "SDA" at 1999.06,-1647.72 h35; Top Overlay "SCL" at 1990.63,-1549.37 h35